# Altium PCB Motor Board.PcbDoc
Units mm, origin at the board's own origin, x right, y up, seen from the top; angles counter-clockwise.
Board outline 152.4 x 101.6 mm, 2 copper layers (Top Layer, Bottom Layer); 15 components, 13 nets, 62 pads, 0 vias.
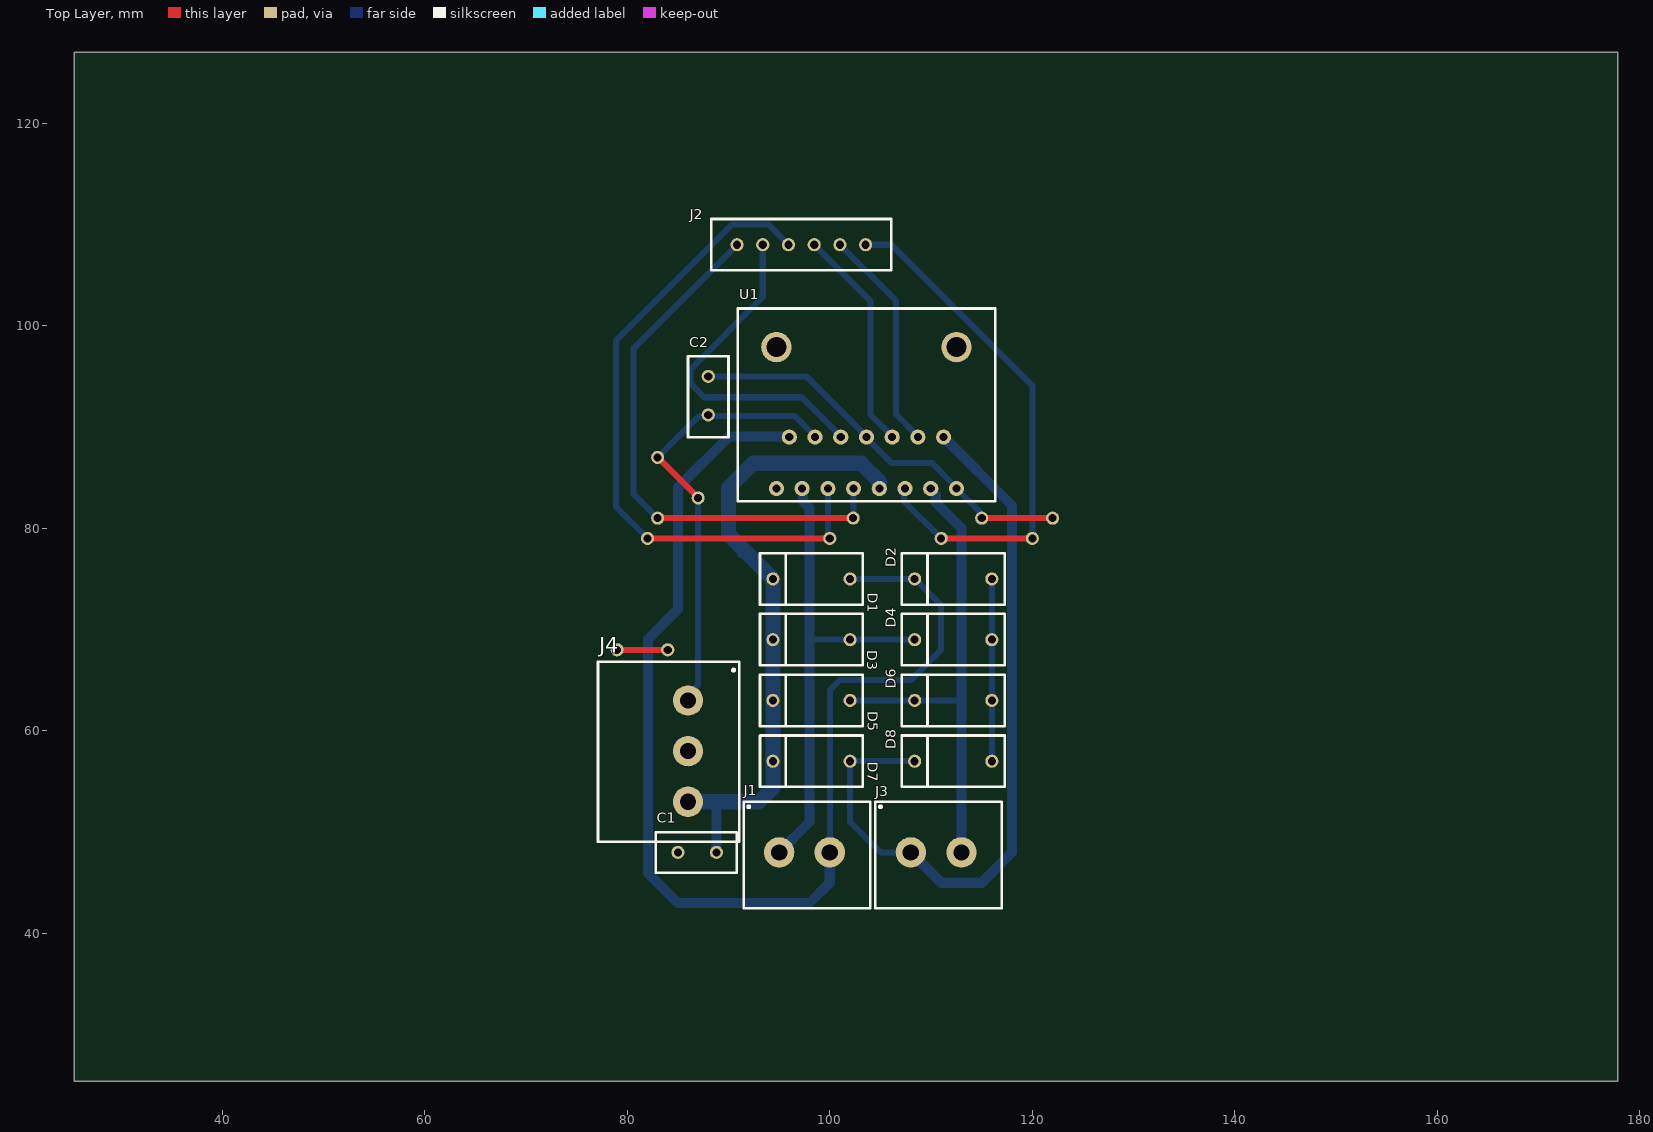
[diagram p0: Top Layer view]
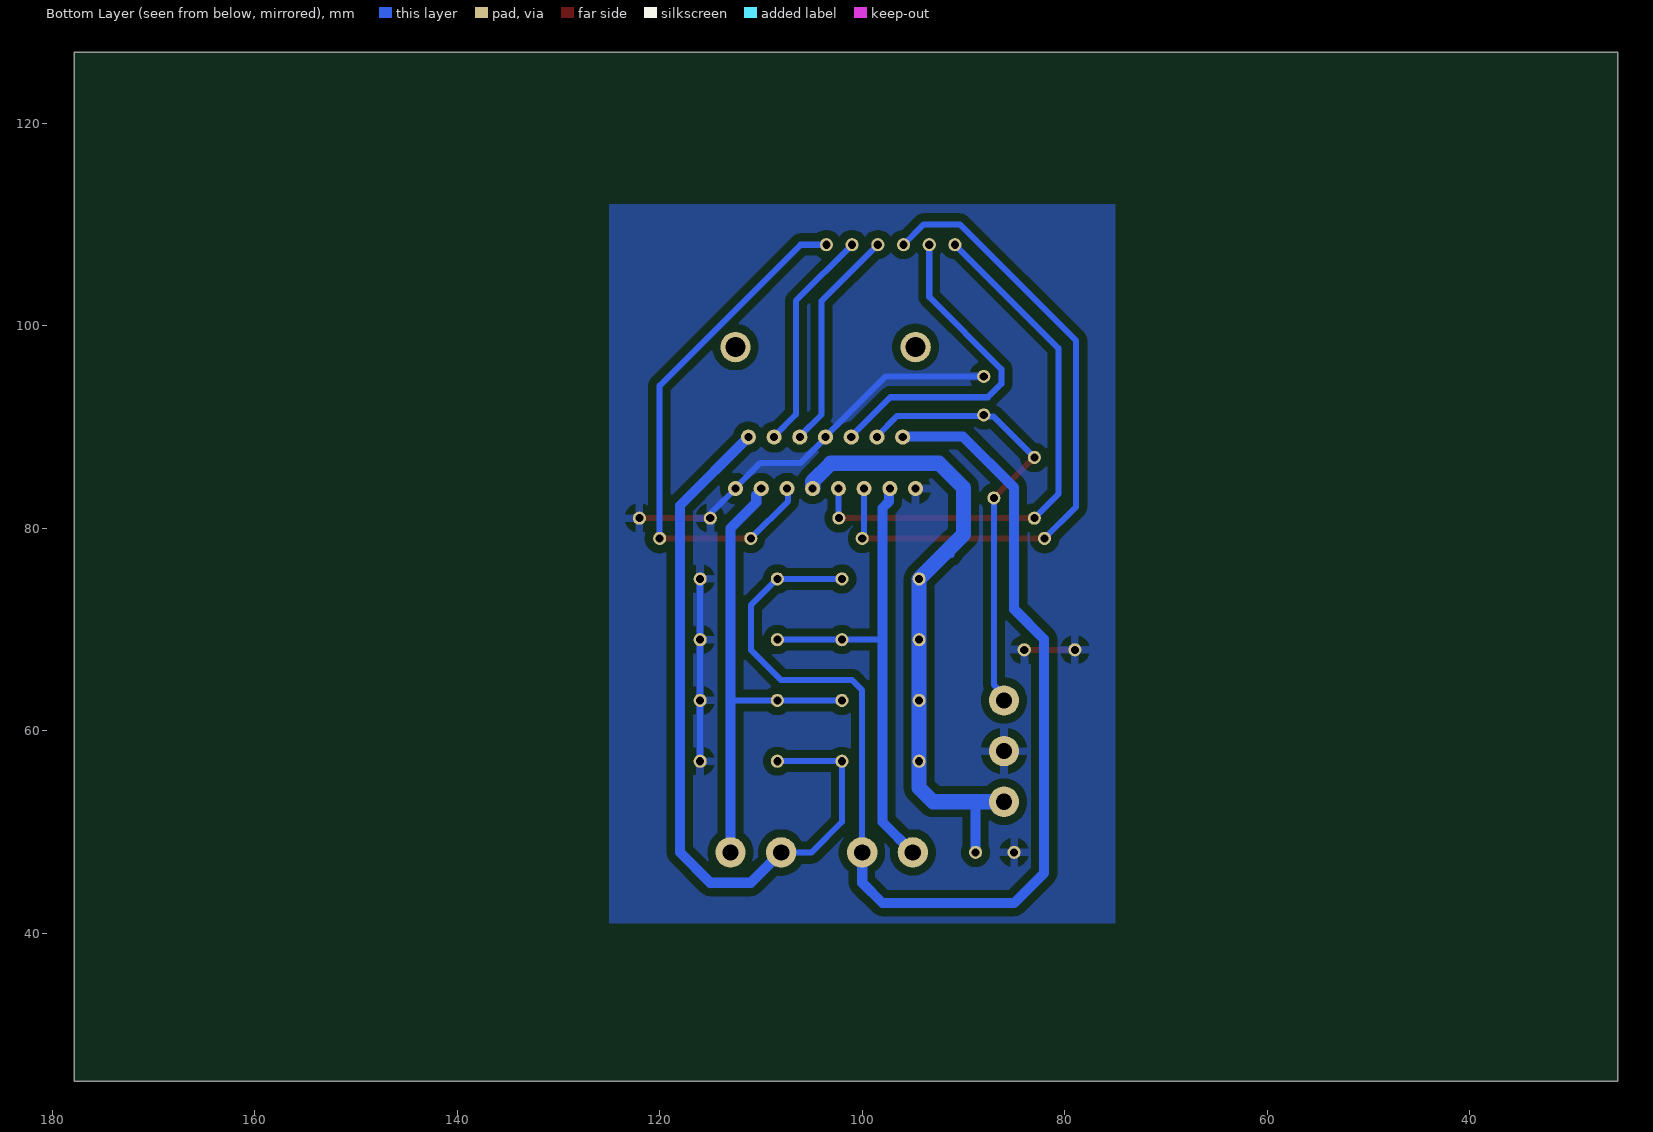
[diagram p1: Bottom Layer view, seen from below]

## Layer stack, top to bottom
Top Solder: solder mask 0.0102, Solder Resist, Dk 3.5
Top Layer: signal copper 0.0356
Dielectric 1: dielectric 0.32, FR-4, Dk 4.8
Bottom Layer: signal copper 0.0356
Bottom Solder: solder mask 0.0102, Solder Resist, Dk 3.5

## Board outline
25.4,25.4 177.8,25.4 177.8,127 25.4,127

## Design rules (kind name [scope] priority, off if disabled: settings)
Clearance [All] p1: gap=0.8 ignorepadtopadclearanceinfootprint=FALSE
Height [All] p1: minheight=0 maxheight=50 prefheight=12.7
PlaneClearance [All] p1: clearance=0.8
PlaneConnect [All] p1: planeconnectstyle=Relief reliefexpansion=0.8 reliefentries=4 reliefconductorwidth=0.8 reliefairgap=0.8
PolygonConnect [All] p1: connectstyle=Relief reliefconductorwidth=0.8 reliefentries=4 polygonreliefangle="90 Angle" airgapwidth=0.8
RoutingVias [All] p1: holewidth=0.711 width=1.27 viastyle="Through Hole" minholewidth=0.711 minwidth=1.27 maxholewidth=0.711 maxwidth=1.27
SolderMaskExpansion [All] p1: expansion=0.102 istentingtop=FALSE
Width [All] p1: maxlimit=1.5 minlimit=0.6 preferedwidth=0.8 minimp=50.000000 maximp=50.000000 favimp=50.000000
27 further rules are at their usual default settings.

## Components (designator, comment, footprint, x,y, rotation, side; value= is the part's Value field where it differs from the comment)
C1 "Ceramic Capacitor" "Ceramic Cap" 88.81,48 r180 top value=100nF
C2 "Ceramic Capacitor" "Ceramic Cap" 88,95 r270 top value=100nF
D1 "Diode" 2A07 102,75 r180 top
D2 "Diode" 2A07 116,75 r180 top
D3 "Diode" 2A07 102,69 r180 top
D4 "Diode" 2A07 116,69 r180 top
D5 "Diode" 2A07 102,63 r180 top
D6 "Diode" 2A07 116,63 r180 top
D7 "Diode" 2A07 102,57 r180 top
D8 "Diode" 2A07 116,57 r180 top
J1 "Motor 1" "Terminal Block 2-pins" 95,48 r0 top
J2 "Headers-6" "Headers 6-pins" 90.84,108 r0 top
J3 "Motor 2" "Terminal Block 2-pins" 108,48 r0 top
J4 "Terminal Block 3" "Terminal Block 3" 86,63 r270 top
U1 "L298N" L298N 94.73,83.92 r0 top

## Footprints (in the part's own frame and the unit in brackets; to place one, negate y for a bottom-side part, rotate by r counter-clockwise, add the part's x,y. Pads: shape width x height; smd on the part's side, far side on the other; paste and mask are expansions set on the pad)
2A07 [mm]
  round 1.3 hole 0.8: 1(0,0) 2(7.62,0)
  silkscreen extent -1.27,-2.54 8.89,2.54, body extent -0.26,-1.27 7.88,1.26, height 2.47
"Ceramic Cap" [mm]
  round 1.3 hole 0.8: 1(0,0) 2(3.81,0)
  silkscreen extent -2,-2 6,2, body extent -0.83,-1.21 4.83,1.25, height 4
"Headers 6-pins" [mm]
  round 1.3 hole 0.8: 1(0,0) 2(2.54,0) 3(5.08,0) 4(7.62,0) 5(10.16,0) 6(12.7,0)
  silkscreen extent -2.54,-2.54 15.24,2.54, body extent -1.27,-1.27 13.97,1.27, height 8.47
L298N [mm]
  round 1.5 hole 0.8: 1(0,0) 2(1.27,5.08) 3(2.54,0) 4(3.81,5.08) 5(5.08,0) 6(6.35,5.08) 7(7.62,0) 8(8.89,5.08) 9(10.16,0) 10(11.43,5.08) 11(12.7,0) 12(13.97,5.08) 13(15.24,0) 14(16.51,5.08) 15(17.78,0)
  round 3 hole 2: S1(0,13.97) S2(17.78,13.97)
  silkscreen extent -3.81,-1.27 21.59,17.78, body extent -2.63,-0.28 20.37,16.74, height 25.7
"Terminal Block 2-pins" [mm] "Throwhole"
  round 3 hole 1.6: 1(0,0) 2(5,0)
  silkscreen extent -3.5,-5.5 9,5, body extent -2.44,-4.96 7.96,4.04, height 11.7
"Terminal Block 3" [mm]
  round 3 hole 1.6: 1(0,0) 2(5,0) 3(10,0)
  silkscreen extent -3.81,-8.89 13.97,5.08, body extent -2.54,-8.29 12.7,3.81, height 8.67

## Part data
J1 J3: library part "Terminal Block 2-pins", MF="Phoenix Contact", PN=1935161, Supplier=Digikey, Supplier PN=277-1667-ND
D1 D2 D3 D4 D5 D6 D7 D8: ComponentLink1Description="New link", ComponentLink1URL=https://electra.store/product/2a07-700v-2a-diode/, MF PN=2A07, Supplier=Electra, Supplier PN=2A07
U1: ComponentLink1Description=Link, ComponentLink1URL=https://electra.store/product/l298-dip-dual-full-bridge-driver/, PN=L298N, Supplier=Electra

## Free pads (board coordinates)
  round 1.3 hole 0.8: 1(82,79) 2(100,79) 4(102.308,81.008) 5(83,81) 6(111,79) 7(120,79) 8(84,68) 9(79,68) 12(115,81) 13(122,81) 14(87,83) 15(83,87)

## Nets (pads, with @x,y where several pads share a name; then routed paths per layer and width w, separated by ;. In a path a pad name is that pad's centre, name@x,y a point inside that pad or via, vN(x,y) a via of type N, cw(c..) or ccw(c..) an arc to the next point about the centre after c; other vN are vias at no path point)
+5V0: C2.2 J4.1 pad.14 pad.15 U1.4 | length 44.5
  Top Layer w0.6: pad.15 pad.14 ; C2.2@87.866,91.056 C2.2
  Bottom Layer w0.6: pad.15 87.056,91.056 87.866,91.056 C2.2 88.1,91.09 96.526,91.09 98.54,89.076 U1.4 ; J4.1 86,63.551 87,64.551 pad.14
+12V0: C1.1 D1.2 D3.2 D5.2 D7.2 J4.3 U1.9 | length 63.8
  Bottom Layer w0.6: C1.1 C1.1@88.865,47.945 ; 91.19,77.38 91.19,78.19
  Bottom Layer w1: C1.1 88.81,52.81 89,53 ; U1.9 U1.9@104.986,84.016
  Bottom Layer w1.5: J4.3 89,53 93,53 94.38,54.38 D7.2 D5.2 D3.2 D1.2 91.19,78.19 90,79.38 90,84 92.425,86.425 103.098,86.425 104.89,84.633 U1.9
GND: C1.2 C2.1 D2.1 D4.1 D6.1 D8.1 J4.2 pad.8 pad.9 pad.12 pad.13 U1.1 U1.8 U1.15 | length 63.3
  Top Layer w0.6: pad.9 pad.8 ; pad.12 pad.13
  Bottom Layer w0.6: C2.1 97.696,95 103.62,89.076 U1.8 103.62,88.924 106.084,86.46 110.046,86.46 112.51,83.996 U1.15 114.866,81.564 114.866,81.134 pad.12 ; U1.1 U1.1@94.73,83.996 ; D8.1 D6.1 D4.1 D2.1
Motor1_BWD: J2.1 pad.4 pad.5 U1.7 | length 54.5
  Top Layer w0.6: pad.5 pad.4 pad.4@102.341,81.008
  Bottom Layer w0.6: pad.5 80.625,83.375 80.625,97.785 J2.1 ; pad.4 102.329,81.029 102.329,83.899 U1.7
Motor1_EN: J2.2 U1.6 | length 33.7
  Bottom Layer w0.6: J2.2 93.38,102.855 86.25,95.725 86.25,94.275 87.585,92.94 97.216,92.94 101.08,89.076 U1.6
Motor1_FWD: J2.3 pad.1 pad.2 U1.5 | length 66.4
  Top Layer w0.6: pad.1 pad.2
  Bottom Layer w0.6: pad.1 78.88,82.12 78.88,98.515 90.365,110 93.92,110 J2.3 ; U1.5 99.81,79.379 100,79.189 pad.2
Motor1_O1: D1.1 D2.2 J1.2 U1.2 | length 118.5
  Bottom Layer w0.6: J1.2 100,64 101,65 108,65 111,68 111,72.38 D2.2 D1.1
  Bottom Layer w1: U1.2 95.95,89.05 90.05,89.05 85,84 85,72 82.05,69.05 82.05,45.95 85,43 98,43 100,45 J1.2
Motor1_O2: D3.1 D4.2 J1.1 U1.3 | length 47.8
  Bottom Layer w0.6: 98,69 D3.1 D4.2
  Bottom Layer w1: J1.1 98,51 98,69 98,82 97.366,82.634 97.366,83.824 U1.3
Motor2_BWD: J2.5 U1.12 | length 22.2
  Bottom Layer w0.6: J2.5 106.54,102.46 106.54,91.236 108.7,89.076 U1.12
Motor2_EN: J2.6 pad.6 pad.7 U1.11 | length 52.8
  Top Layer w0.6: pad.6 pad.7
  Bottom Layer w0.6: J2.6 106.08,108 120,94.08 pad.7 ; U1.11 107.322,83.812 107.322,82.678 pad.6
Motor2_FWD: J2.4 U1.10 | length 22.2
  Bottom Layer w0.6: J2.4 104,102.46 104,91.236 106.16,89.076 U1.10
Motor2_O1: D5.1 D6.2 J3.2 U1.13 | length 48.2
  Bottom Layer w0.6: D5.1 D6.2 113,63
  Bottom Layer w1: U1.13 109.97,83.785 110.46,83.295 110.46,82.54 113,80 113,63 J3.2
Motor2_O2: D7.1 D8.2 J3.1 U1.14 | length 76.1
  Bottom Layer w0.6: J3.1 105,48 102,51 D7.1 D8.2 D8.2@108.38,56.811
  Bottom Layer w1: J3.1 111,45 115,45 118,48 118,82.24 U1.14
pads on no net: U1.S1 U1.S2

## Polygon pours and split planes (outlines as drawn)
GND on Bottom Layer "NONET_L01_P-001" (solid, pour order 0): 125,112 75,112 75,41 125,41